# EAGLE board eCog115_PS2 (EAGLE 6.6.0)
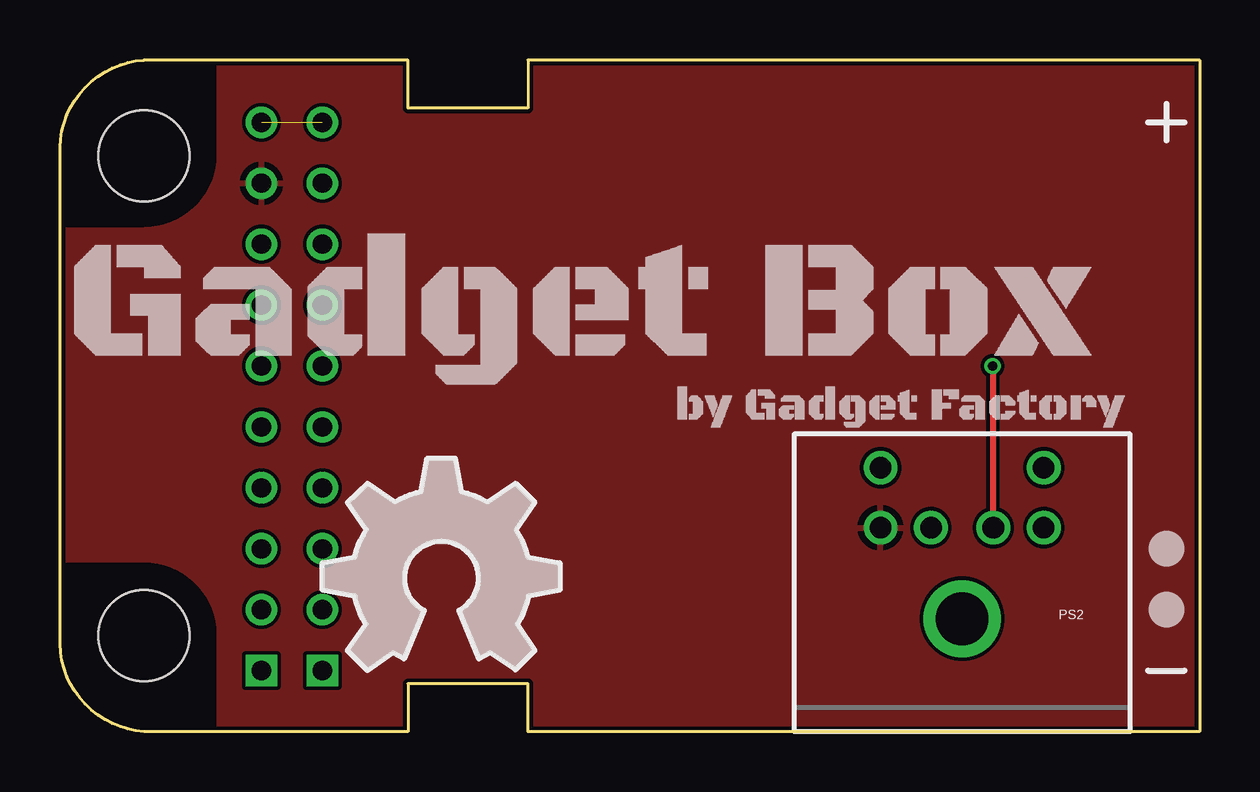
[diagram p0: board, top side]
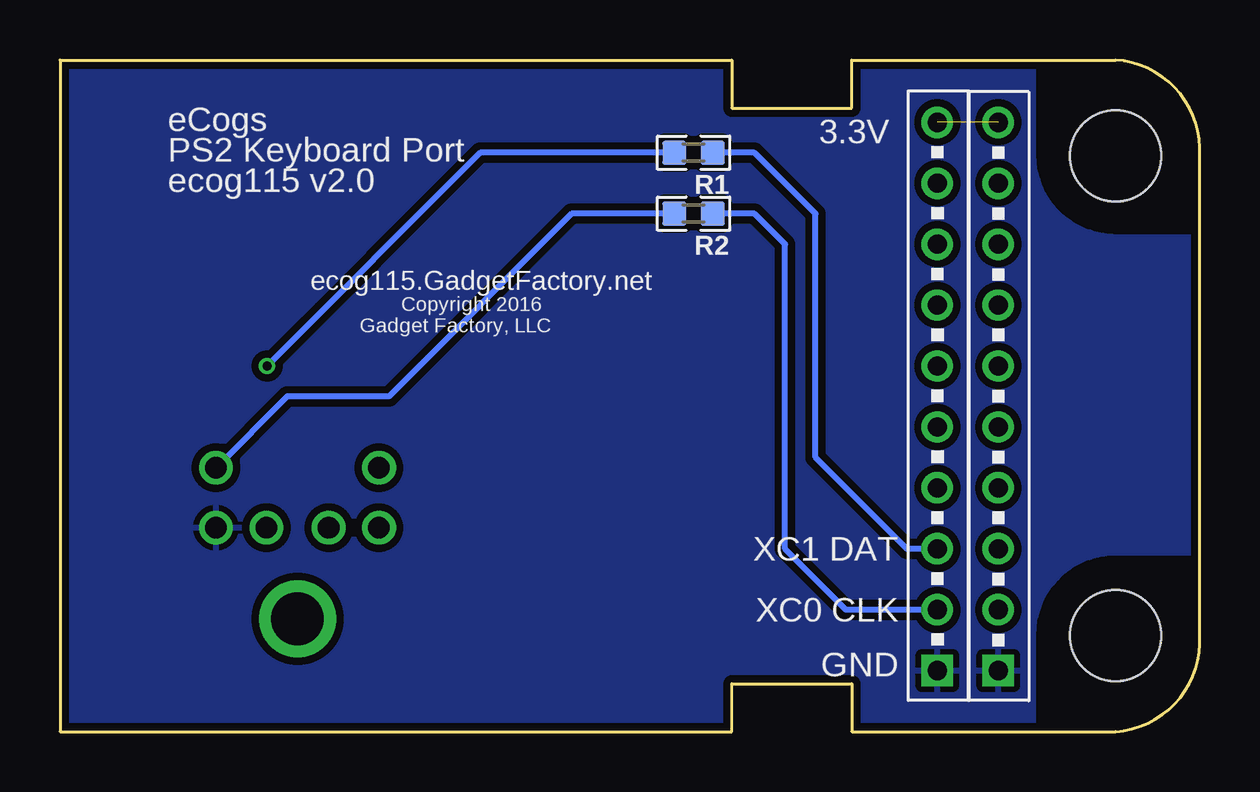
[diagram p1: board, bottom side, seen from below]

Size 47.51 x 28 mm. Coordinates in mm from the lower left corner, seen from the top.
Copper layers (1*16): Top 0.035mm / dielectric 1.5mm / Bottom 0.035mm
Design rules "hackvana *": minimum track width 6mil, minimum drill 0.3mm, track to track 6mil, track to pad 6mil, pad to pad 6mil, via to via 6mil, smd to smd 0mil, copper to edge 6mil, drill to drill 6mil, minimum pad ring 10mil, minimum via ring 6mil, stop-mask expansion 2mil, vias tented up to drill 100mil, thermal gap 10mil

## Footprints (pad centres in the part's own frame; a part is rotated, then mirrored left to right if it is on the bottom)
ECOG_DUAL_TH = drill 0.8: 3V3 11.43,25.4; 3V3@B10 8.89,25.4; 5V0 8.89,22.86; G0 11.43,5.08; G1 11.43,7.62; G2 11.43,10.16; G3 11.43,12.7; G4 11.43,15.24; G5 11.43,17.78; G6 11.43,20.32; G7 11.43,22.86; I2C-SCL 8.89,17.78; I2C-SDA 8.89,15.24; RESET 8.89,20.32; SPI-CS 8.89,12.7; SPI-MISO 8.89,5.08; SPI-MOSI 8.89,7.62; SPI-SCK 8.89,10.16 | drill 0.8 square: GND 11.43,2.54; GND@B0 8.89,2.54 | hole 3.8: 4,24; 4,4
MINI-DIN6 = drill 0.9: 1 -1.3,-8.5; 2 1.3,-8.5; 3 -3.4,-8.5; 4 3.4,-8.5; 5 -3.4,-11; 6 3.4,-11 | drill 2.2: P$1 0,-4.7
0603 = smd 1 x 1: 1 -0.8,0; 2 0.8,0

## Placement (x,y rotation side)
ECOG  ECOG_DUALTHROUGHHOLE  [ECOG_DUAL_TH]  -0.49,0 0 top
PS2  MINI-DIN6PTH  [MINI-DIN6]  37.61,0 180 top
R1  390  [0603]  21.1,24.13 180 bottom
R2  390  [0603]  21.1,21.59 180 bottom
U$1  [GADGETBOX_TEXT]  21.86,17.4 0 top
U$3  [LEGEND_DIO]  46.12,7.62 0 top
U$4  [LEGEND_DIO]  46.12,5.08 0 top
U$10  [OSHW_FILLX350_NOTEXT]  10.94,2.54 0 top

## Library data of the parts
ECOG U$3 U$4 = eCogs
PS2 = SparkFun-Connectors
R1 R2 U$1 = GadgetFactory
U$10 = ohw-logo

## Nets
3V3: ECOG.3V3 ECOG.3V3@B10
5V0: ECOG.5V0 PS2.4
GND: ECOG.GND ECOG.GND@B0 PS2.3
N$14: PS2.1 R1.2
N$15: PS2.5 R2.2
PS2CLK2: ECOG.G0 R2.1
PS2DAT2: ECOG.G1 R1.1

## Tracks (layer width: path | path; a pad name or v marks a point on that pad's centre or on a via)
3V3  (1 unrouted)
5V0
  pour Top: -1.49,29 48.51,29 48.51,-1 -1.49,-1
GND
  pour Bottom (isolate 0.305): -2.49,30 49.51,30 49.51,-2 -2.49,-2
N$14  (via drill 0.38)
  Top 0.254: v38.88,15.24 38.88,8.53 PS2.1
  Bottom 0.254: R1.2 29.99,24.13 v38.88,15.24
N$15
  Bottom 0.254: R2.2 26.18,21.59 33.8,13.97 38.04,13.97 PS2.5
PS2CLK2
  Bottom 0.254: ECOG.G0 14.75,5.08 17.29,7.62 17.29,20.32 18.56,21.59 R2.1
PS2DAT2
  Bottom 0.254: ECOG.G1 12.21,7.62 16.02,11.43 16.02,21.59 18.56,24.13 R1.1

## Text on the board
bPlace: 3.3V | eCogs | PS2 Keyboard Port | ecog115 v2.0 | Copyright 2016 | ecog115.GadgetFactory.net | Gadget Factory, LLC | XC1 DAT | XC0 CLK | GND